# EAGLE board tin (EAGLE 6.3)
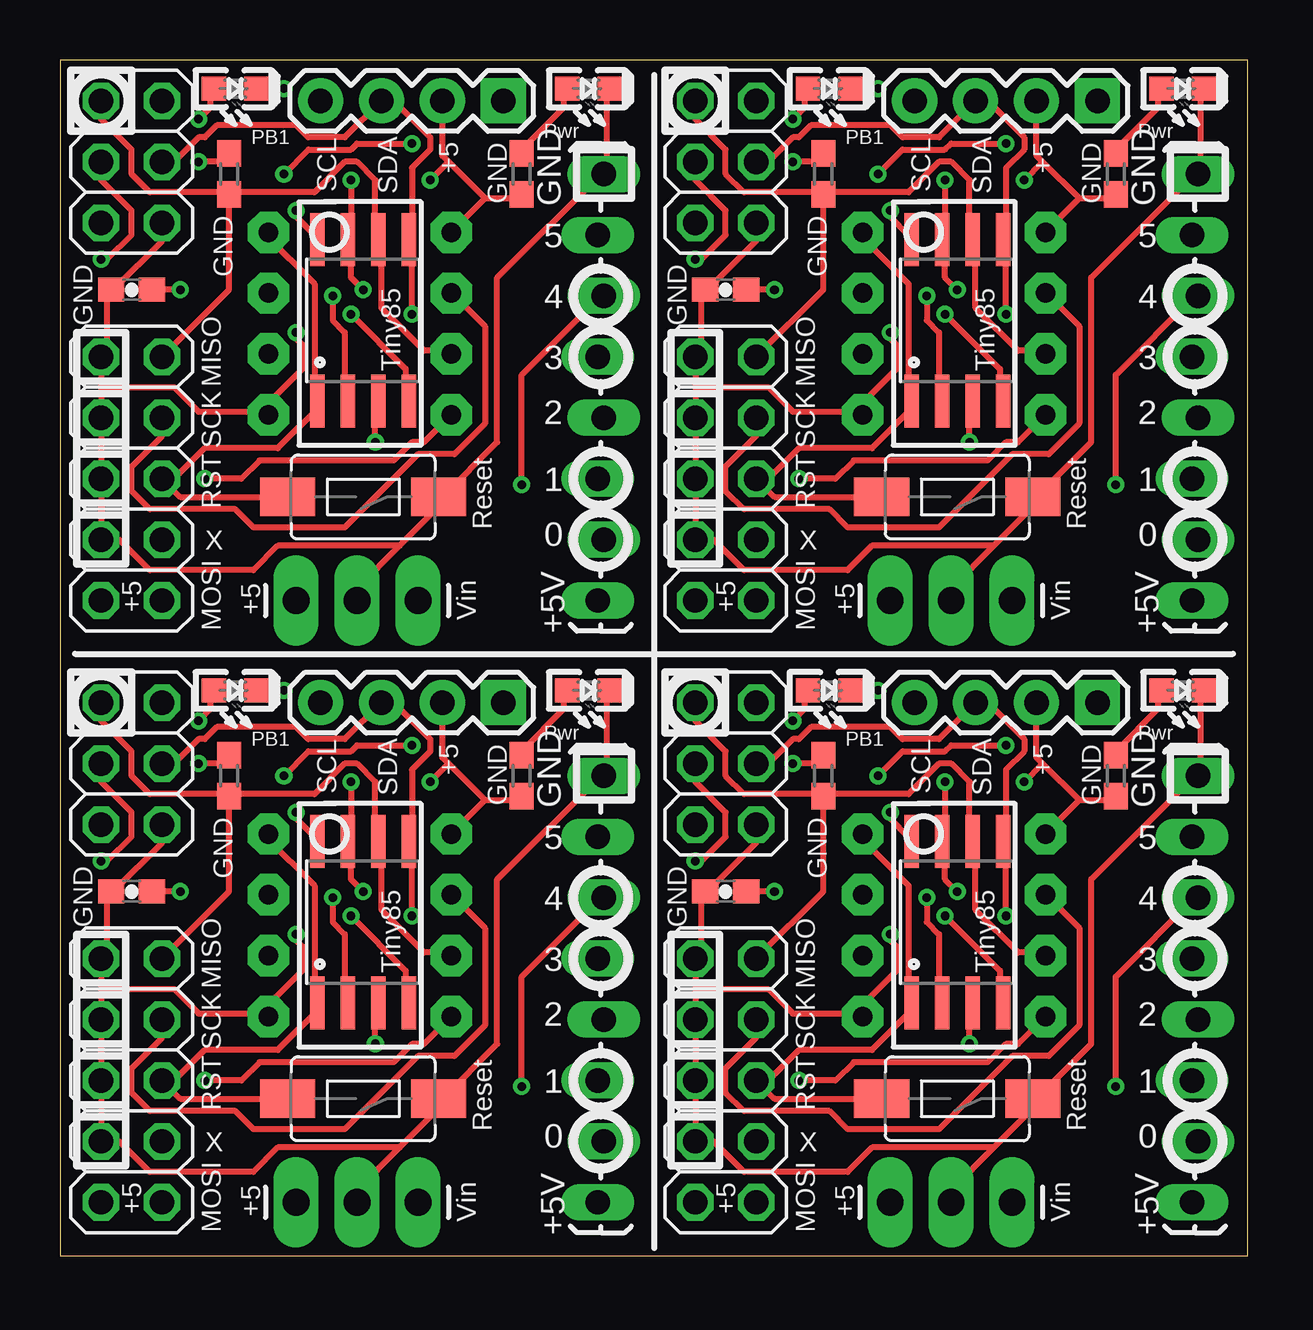
[diagram p0: board, top side]
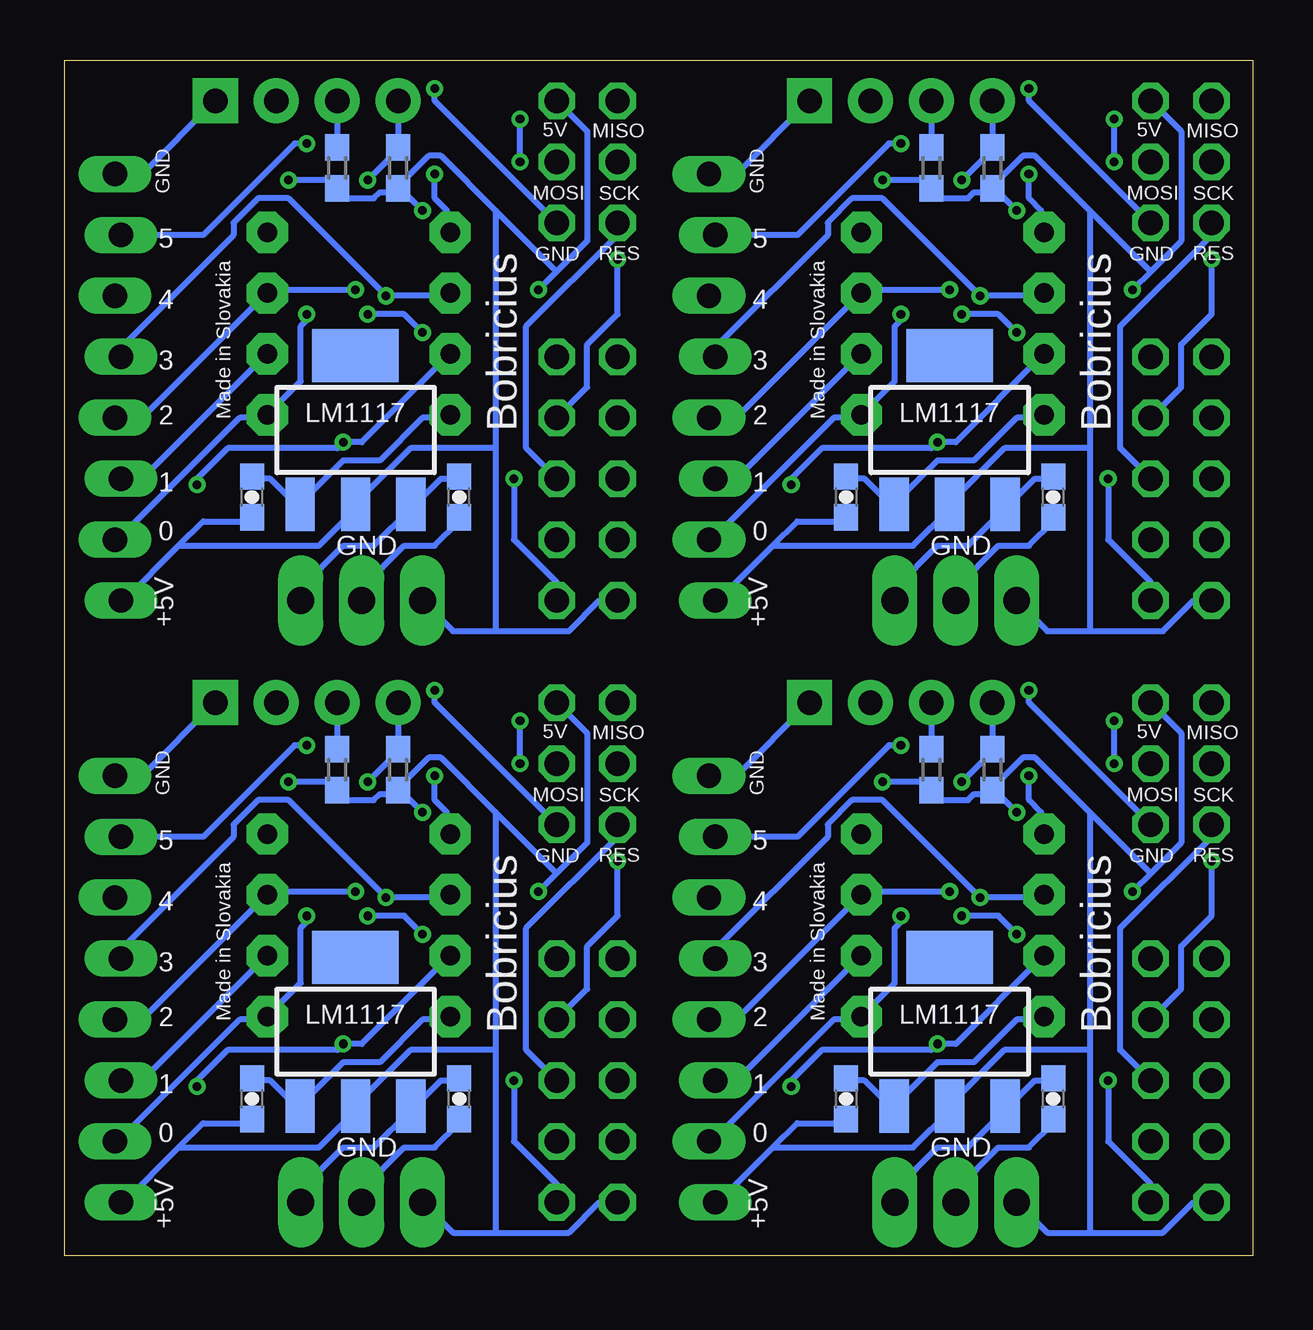
[diagram p1: board, bottom side, seen from below]

Size 49.52 x 49.84 mm. Coordinates in mm from the lower left corner, seen from the top.
Outline: 0,0 49.52,0 49.52,49.84 0,49.84 0,0
Copper layers (1*16): Top 0.0356mm / dielectric 1.5011mm / Bottom 0.0356mm
Design rules "LaenPCBOrder *": minimum track width 6mil, minimum drill 13mil, track to track 6mil, track to pad 6mil, pad to pad 6mil, via to via 6mil, smd to smd 6mil, copper to edge 15mil, drill to drill 6mil, minimum pad ring 7mil, minimum via ring 7mil, stop-mask expansion 4mil, vias tented up to drill 30mil, thermal gap 10mil
Net classes: 0 default: width 0.229 mm, drill 0.381 mm, clearance 0.229 mm; 1 GND: width 0.229 mm, drill 0.381 mm, clearance 0.229 mm; 2 pwr: width 0.229 mm, drill 0.381 mm, clearance 0.229 mm

## Footprints (pad centres in the part's own frame; a part is rotated, then mirrored left to right if it is on the bottom)
0603-CAP = smd 1.1 x 1: 1 -0.85,0; 2 0.85,0
SOT223 = smd 1.219 x 2.235: 1 -2.311,-3.099; 2 0,-3.099; 3 2.311,-3.099 | smd 3.6 x 2.2: 4 0,3.099
2X03 = drill 1.016 octagon: 1 -2.54,-1.27; 2 -2.54,1.27; 3 0,-1.27; 4 0,1.27; 5 2.54,-1.27; 6 2.54,1.27
2X05 = drill 1.016 octagon: 1 -5.08,-1.27; 2 -5.08,1.27; 3 -2.54,-1.27; 4 -2.54,1.27; 5 0,-1.27; 6 0,1.27; 7 2.54,-1.27; 8 2.54,1.27; 9 5.08,-1.27; 10 5.08,1.27
1X08_LOCK_LONGPADS = drill 1.016 long: 1 0,0.127; 2 2.54,-0.127; 3 5.08,0.127; 4 7.62,-0.127; 5 10.16,0.127; 6 12.7,-0.127; 7 15.24,0.127; 8 17.78,-0.127
1X03_LONGPADS = drill 1.118 pad 1.88 long: 1 0,0; 2 2.54,0; 3 5.08,0
1X04 = drill 1.016 pad 1.88 square: 1 0,0 | drill 1.016 pad 1.88: 2 2.54,0; 3 5.08,0; 4 7.62,0
LED-0603 = smd 1.016 x 1.016: A 0.889,0; C -0.889,0
R0603 = smd 1.1 x 1: 1 -0.85,0; 2 0.85,0
TACTILE-SWITCH-1101NE = smd 2.3 x 1.6: P$1 -3.15,0; P$2 3.15,0
DIP08 = drill 0.813 pad 1.727 octagon: 1 -3.81,-3.81; 2 -1.27,-3.81; 3 1.27,-3.81; 4 3.81,-3.81; 5 3.81,3.81; 6 1.27,3.81; 7 -1.27,3.81; 8 -3.81,3.81
SO08-EIAJ = smd 0.61 x 2.21: 1 -1.905,-3.378; 2 -0.635,-3.378; 3 0.635,-3.378; 4 1.905,-3.378; 5 1.905,3.353; 6 0.635,3.353; 7 -0.635,3.353; 8 -1.905,3.353

## Placement (x,y rotation side)
C1  0.1uf  [0603-CAP]  16.95,31.62 270 bottom
C2  0.1uf  [0603-CAP]  8.32,31.62 90 bottom
C3  0.1uf  [0603-CAP]  16.95,6.54 270 bottom
C4  0.1uf  [0603-CAP]  2.98,40.26 0 top
C5  0.1uf  [0603-CAP]  8.32,6.54 90 bottom
C6  0.1uf  [0603-CAP]  2.98,15.18 0 top
C7  0.1uf  [0603-CAP]  41.72,31.62 270 bottom
C8  0.1uf  [0603-CAP]  33.08,31.62 90 bottom
C9  0.1uf  [0603-CAP]  27.75,40.26 0 top
C10  0.1uf  [0603-CAP]  41.72,6.54 270 bottom
C11  0.1uf  [0603-CAP]  33.08,6.54 90 bottom
C12  0.1uf  [0603-CAP]  27.75,15.18 0 top
IC1  [SOT223]  12.64,9.33 0 bottom
IC2  [SOT223]  12.64,34.42 0 bottom
IC3  [SOT223]  37.4,34.42 0 bottom
IC4  [SOT223]  37.4,9.33 0 bottom
JP1  [2X03]  2.98,45.59 270 top
JP2  [2X05]  2.98,7.3 90 top
JP3  [1X08_LOCK_LONGPADS]  22.54,45.08 270 top
JP4  [2X05]  2.98,32.39 90 top
JP5  [1X03_LONGPADS]  9.84,27.31 0 top
JP6  [1X04]  18.48,48.13 180 top
JP7  [1X03_LONGPADS]  9.84,2.22 0 top
JP8  [2X03]  2.98,20.51 270 top
JP9  [1X04]  18.48,23.05 180 top
JP10  [1X08_LOCK_LONGPADS]  22.54,20 270 top
JP11  [2X05]  27.75,32.39 90 top
JP12  [1X03_LONGPADS]  34.61,27.31 0 top
JP13  [2X03]  27.75,45.59 270 top
JP14  [1X04]  43.24,48.13 180 top
JP15  [1X08_LOCK_LONGPADS]  47.31,45.08 270 top
JP16  [2X05]  27.75,7.3 90 top
JP17  [1X03_LONGPADS]  34.61,2.22 0 top
JP18  [2X03]  27.75,20.51 270 top
JP19  [1X04]  43.24,23.05 180 top
JP20  [1X08_LOCK_LONGPADS]  47.31,20 270 top
PB1  NA  [LED-0603]  7.3,48.64 180 top
PB2  NA  [LED-0603]  7.3,23.56 180 top
PB3  NA  [LED-0603]  32.07,48.64 180 top
PB4  NA  [LED-0603]  32.07,23.56 180 top
PWR  NA  [LED-0603]  22.03,48.64 180 top
PWR1  NA  [LED-0603]  22.03,23.56 180 top
PWR2  NA  [LED-0603]  46.8,48.64 180 top
PWR3  NA  [LED-0603]  46.8,23.56 180 top
R1  1k  [R0603]  7.05,45.08 270 top
R2  4K7  [R0603]  13.4,45.34 90 bottom
R3  4K7  [R0603]  10.86,45.34 90 bottom
R4  1k  [R0603]  19.24,20 270 top
R5  1k  [R0603]  19.24,45.08 270 top
R6  1k  [R0603]  7.05,20 270 top
R7  4K7  [R0603]  13.4,20.26 90 bottom
R8  4K7  [R0603]  10.86,20.26 90 bottom
R9  1k  [R0603]  44.01,45.08 270 top
R10  1k  [R0603]  31.81,45.08 270 top
R11  4K7  [R0603]  38.16,45.34 90 bottom
R12  4K7  [R0603]  35.62,45.34 90 bottom
R13  1k  [R0603]  44.01,20 270 top
R14  1k  [R0603]  31.81,20 270 top
R15  4K7  [R0603]  38.16,20.26 90 bottom
R16  4K7  [R0603]  35.62,20.26 90 bottom
RESET  SWITCH-MOMENTARY-2-SMD-1101NE  [TACTILE-SWITCH-1101NE]  12.64,31.62 180 top
RESET1  SWITCH-MOMENTARY-2-SMD-1101NE  [TACTILE-SWITCH-1101NE]  12.64,6.54 180 top
RESET2  SWITCH-MOMENTARY-2-SMD-1101NE  [TACTILE-SWITCH-1101NE]  37.4,31.62 180 top
RESET3  SWITCH-MOMENTARY-2-SMD-1101NE  [TACTILE-SWITCH-1101NE]  37.4,6.54 180 top
U1  TINY85  [DIP08]  12.5,38.85 270 top
U2  Tiny45-20-SMT  [SO08-EIAJ]  12.64,38.99 0 top
U3  TINY85  [DIP08]  12.5,13.77 270 top
U4  Tiny45-20-SMT  [SO08-EIAJ]  12.64,13.91 0 top
U5  TINY85  [DIP08]  37.27,38.85 270 top
U6  Tiny45-20-SMT  [SO08-EIAJ]  37.4,38.99 0 top
U7  TINY85  [DIP08]  37.27,13.77 270 top
U8  Tiny45-20-SMT  [SO08-EIAJ]  37.4,13.91 0 top

## Library data of the parts
C1-C12 IC1-IC4 JP3 JP5-JP7 JP9 JP10 JP12 JP14 JP15 JP17 JP19 JP20 RESET RESET1-RESET3 = SparkFun
JP1 JP2 JP4 JP8 JP11 JP13 JP16 JP18 = pinhead
PB1-PB4 PWR PWR1-PWR3 = DOUBLE-SIDE
R1-R16 = rcl
U1 U3 U5 U7 = SparkFun-DigitalIC; PROD_ID: IC-09439
U2 U4 U6 U8 = SparkFun-DigitalIC; PROD_ID: IC-08922

## Nets
GND: C1.1 C2.1 C4.1 IC2.1 JP1.6 JP3.1 JP4.4 JP4.6 JP4.8 JP4.10 JP5.2 JP6.1 PB1.C PWR.C RESET.P$1 U1.4 U2.4
GND1: C3.1 C5.1 C6.1 IC1.1 JP2.4 JP2.6 JP2.8 JP2.10 JP7.2 JP8.6 JP9.1 JP10.1 PB2.C PWR1.C RESET1.P$1 U3.4 U4.4
GND2: C7.1 C8.1 C9.1 IC3.1 JP11.4 JP11.6 JP11.8 JP11.10 JP12.2 JP13.6 JP14.1 JP15.1 PB3.C PWR2.C RESET2.P$1 U5.4 U6.4
GND3: C10.1 C11.1 C12.1 IC4.1 JP16.4 JP16.6 JP16.8 JP16.10 JP17.2 JP18.6 JP19.1 JP20.1 PB4.C PWR3.C RESET3.P$1 U7.4 U8.4
N$1 [pwr]: PWR1.A R4.1
N$2 [pwr]: PWR2.A R9.1
N$3 [pwr]: PWR.A R5.1
N$4 [pwr]: PWR3.A R13.1
PB1: JP1.1 JP3.6 JP4.9 R1.2 U1.6 U2.6
PB2: JP2.9 JP8.1 JP10.6 R6.2 U3.6 U4.6
PB3: JP11.9 JP13.1 JP15.6 R10.2 U5.6 U6.6
PB4: JP16.9 JP18.1 JP20.6 R14.2 U7.6 U8.6
PIN1R: PB1.A R1.1
PIN1R1: PB2.A R6.1
PIN1R2: PB3.A R10.1
PIN1R3: PB4.A R14.1
RES: JP1.5 JP3.2 JP4.5 RESET.P$2 U1.1 U2.1
RES1: JP2.5 JP8.5 JP10.2 RESET1.P$2 U3.1 U4.1
RES2: JP11.5 JP13.5 JP15.2 RESET2.P$2 U5.1 U6.1
RES3: JP16.5 JP18.5 JP20.2 RESET3.P$2 U7.1 U8.1
SCL: JP1.3 JP3.5 JP4.7 JP6.4 R3.2 U1.7 U2.7
SCL1: JP2.7 JP8.3 JP9.4 JP10.5 R8.2 U3.7 U4.7
SCL2: JP11.7 JP13.3 JP14.4 JP15.5 R12.2 U5.7 U6.7
SCL3: JP16.7 JP18.3 JP19.4 JP20.5 R16.2 U7.7 U8.7
SDA: JP1.4 JP3.7 JP4.1 JP6.3 R2.2 U1.5 U2.5
SDA1: JP2.1 JP8.4 JP9.3 JP10.7 R7.2 U3.5 U4.5
SDA2: JP11.1 JP13.4 JP14.3 JP15.7 R11.2 U5.5 U6.5
SDA3: JP16.1 JP18.4 JP19.3 JP20.7 R15.2 U7.5 U8.5
USBM: JP3.4 U1.2 U2.2
USBM1: JP10.4 U3.2 U4.2
USBM2: JP15.4 U5.2 U6.2
USBM3: JP20.4 U7.2 U8.2
USBP: JP3.3 U1.3 U2.3
USBP1: JP10.3 U3.3 U4.3
USBP2: JP15.3 U5.3 U6.3
USBP3: JP20.3 U7.3 U8.3
VCC [pwr]: C1.2 C4.2 IC2.2 JP1.2 JP3.8 JP4.2 JP5.1 JP6.2 R2.1 R3.1 R5.2 U1.8 U2.8
VCC1 [pwr]: C3.2 C6.2 IC1.2 JP2.2 JP7.1 JP8.2 JP9.2 JP10.8 R4.2 R7.1 R8.1 U3.8 U4.8
VCC2 [pwr]: C7.2 C9.2 IC3.2 JP11.2 JP12.1 JP13.2 JP14.2 JP15.8 R9.2 R11.1 R12.1 U5.8 U6.8
VCC3 [pwr]: C10.2 C12.2 IC4.2 JP16.2 JP17.1 JP18.2 JP19.2 JP20.8 R13.2 R15.1 R16.1 U7.8 U8.8
VIN: C2.2 IC2.3 JP5.3
VIN1: C5.2 IC1.3 JP7.3
VIN2: C8.2 IC3.3 JP12.3
VIN3: C11.2 IC4.3 JP17.3

## Tracks (layer width: path | path; a pad name or v marks a point on that pad's centre or on a via)
GND  (via drill 0.36)
  Top 0.254: v12.13,39.24 14.41,36.96 14.41,35.69 U2.4 | v9.84,38.48 9.84,38.23 10.1,37.97 10.1,36.96 8.83,35.69 8.83,35.18 U1.4 8.57,35.18 5.78,35.18 4.76,36.19 1.71,36.19 | v9.33,48.64 PB1.C | 1.71,36.19 JP4.10 1.97,37.72 1.97,40.26 C4.1 2.22,40.26 4.25,42.29 JP1.6 | 1.71,36.19 JP4.8 JP4.6 JP4.4 2.48,29.85 3.75,28.57 8.06,28.57 9.08,29.59 14.16,29.59 | PWR.C 22.8,48.64 22.8,45.08 JP3.1 22.54,45.08 18.22,40.77 18.22,33.91 15.94,31.62 RESET.P$1 15.68,31.62 15.68,31.11 14.16,29.59 | 14.16,29.59 12.38,27.81 JP5.2
  Bottom 0.254: C1.1 16.95,32.39 16.19,32.39 15.18,31.37 IC2.1 14.92,31.37 13.14,33.15 11.62,33.15 9.84,34.92 8.83,34.92 U1.4 | v12.13,39.24 10.6,39.24 v9.84,38.48 | v9.33,48.64 9.33,48.13 JP1.6 | JP3.1 21.53,45.08 JP6.1 | JP5.2 12.38,27.81 10.6,29.59 9.33,29.59 8.32,30.61 C2.1
GND1  (via drill 0.36)
  Top 0.254: v12.13,14.16 14.41,11.88 14.41,10.61 U4.4 | v9.84,13.4 9.84,13.14 10.1,12.89 10.1,11.88 8.83,10.61 8.83,10.1 U3.4 8.57,10.1 5.78,10.1 4.76,11.11 1.71,11.11 | v9.33,23.56 PB2.C | 1.71,11.11 JP2.10 1.97,12.64 1.97,15.18 C6.1 2.22,15.18 4.25,17.21 JP8.6 | 1.71,11.11 JP2.8 JP2.6 JP2.4 2.48,4.76 3.75,3.49 8.06,3.49 9.08,4.51 14.16,4.51 | PWR1.C 22.8,23.56 22.8,20 JP10.1 22.54,20 18.22,15.68 18.22,8.83 15.94,6.54 RESET1.P$1 15.68,6.54 15.68,6.03 14.16,4.51 | 14.16,4.51 12.38,2.73 JP7.2
  Bottom 0.254: C3.1 16.95,7.3 16.19,7.3 15.18,6.29 IC1.1 14.92,6.29 13.14,8.06 11.62,8.06 9.84,9.84 8.83,9.84 U3.4 | v12.13,14.16 10.6,14.16 v9.84,13.4 | v9.33,23.56 9.33,23.05 JP8.6 | JP10.1 21.53,20 JP9.1 | JP7.2 12.38,2.73 10.6,4.51 9.33,4.51 8.32,5.52 C5.1
GND2  (via drill 0.36)
  Top 0.254: v36.89,39.24 39.18,36.96 39.18,35.69 U6.4 | v34.61,38.48 34.61,38.23 34.86,37.97 34.86,36.96 33.59,35.69 33.59,35.18 U5.4 33.34,35.18 30.54,35.18 29.53,36.19 26.48,36.19 | v34.1,48.64 PB3.C | 26.48,36.19 JP11.10 26.73,37.72 26.73,40.26 C9.1 26.99,40.26 29.02,42.29 JP13.6 | 26.48,36.19 JP11.8 JP11.6 JP11.4 27.24,29.85 28.51,28.57 32.83,28.57 33.85,29.59 38.93,29.59 | PWR2.C 47.56,48.64 47.56,45.08 JP15.1 47.31,45.08 42.99,40.77 42.99,33.91 40.7,31.62 RESET2.P$1 40.45,31.62 40.45,31.11 38.93,29.59 | 38.93,29.59 37.15,27.81 JP12.2
  Bottom 0.254: C7.1 41.72,32.39 40.96,32.39 39.94,31.37 IC3.1 39.69,31.37 37.91,33.15 36.39,33.15 34.61,34.92 33.59,34.92 U5.4 | v36.89,39.24 35.37,39.24 v34.61,38.48 | v34.1,48.64 34.1,48.13 JP13.6 | JP15.1 46.29,45.08 JP14.1 | JP12.2 37.15,27.81 35.37,29.59 34.1,29.59 33.08,30.61 C8.1
GND3  (via drill 0.36)
  Top 0.254: v36.89,14.16 39.18,11.88 39.18,10.61 U8.4 | v34.61,13.4 34.61,13.14 34.86,12.89 34.86,11.88 33.59,10.61 33.59,10.1 U7.4 33.34,10.1 30.54,10.1 29.53,11.11 26.48,11.11 | v34.1,23.56 PB4.C | 26.48,11.11 JP16.10 26.73,12.64 26.73,15.18 C12.1 26.99,15.18 29.02,17.21 JP18.6 | 26.48,11.11 JP16.8 JP16.6 JP16.4 27.24,4.76 28.51,3.49 32.83,3.49 33.85,4.51 38.93,4.51 | PWR3.C 47.56,23.56 47.56,20 JP20.1 47.31,20 42.99,15.68 42.99,8.83 40.7,6.54 RESET3.P$1 40.45,6.54 40.45,6.03 38.93,4.51 | 38.93,4.51 37.15,2.73 JP17.2
  Bottom 0.254: C10.1 41.72,7.3 40.96,7.3 39.94,6.29 IC4.1 39.69,6.29 37.91,8.06 36.39,8.06 34.61,9.84 33.59,9.84 U7.4 | v36.89,14.16 35.37,14.16 v34.61,13.4 | v34.1,23.56 34.1,23.05 JP18.6 | JP20.1 46.29,20 JP19.1 | JP17.2 37.15,2.73 35.37,4.51 34.1,4.51 33.08,5.52 C11.1
N$1
  Top 0.254: PWR1.A 21.02,23.56 21.02,22.8 19.24,21.02 R4.1
N$2
  Top 0.254: PWR2.A 45.78,48.64 45.78,47.88 44.01,46.1 R9.1
N$3
  Top 0.254: PWR.A 21.02,48.64 21.02,47.88 19.24,46.1 R5.1
N$4
  Top 0.254: PWR3.A 45.78,23.56 45.78,22.8 44.01,21.02 R13.1
PB1
  Top 0.254: JP4.9 7.05,40.26 R1.2 7.05,44.32 | JP1.1 1.71,47.37 2.98,46.1 2.98,45.08 3.75,44.32 7.05,44.32 | U1.6 16.19,37.72 15.18,37.72 13.4,39.5 13.4,42.29 U2.6 13.14,42.55 13.14,44.83 12.38,45.59 11.87,45.59 10.6,44.32 7.05,44.32
  Bottom 0.254: JP3.6 21.53,32.39 16.45,37.47 U1.6
PB2
  Top 0.254: JP2.9 7.05,15.18 R6.2 7.05,19.24 | JP8.1 1.71,22.29 2.98,21.02 2.98,20 3.75,19.24 7.05,19.24 | U3.6 16.19,12.64 15.18,12.64 13.4,14.41 13.4,17.21 U4.6 13.14,17.46 13.14,19.75 12.38,20.51 11.87,20.51 10.6,19.24 7.05,19.24
  Bottom 0.254: JP10.6 21.53,7.3 16.45,12.38 U3.6
PB3
  Top 0.254: JP11.9 31.81,40.26 R10.2 31.81,44.32 | JP13.1 26.48,47.37 27.75,46.1 27.75,45.08 28.51,44.32 31.81,44.32 | U5.6 40.96,37.72 39.94,37.72 38.16,39.5 38.16,42.29 U6.6 37.91,42.55 37.91,44.83 37.15,45.59 36.64,45.59 35.37,44.32 31.81,44.32
  Bottom 0.254: JP15.6 46.29,32.39 41.21,37.47 U5.6
PB4
  Top 0.254: JP16.9 31.81,15.18 R14.2 31.81,19.24 | JP18.1 26.48,22.29 27.75,21.02 27.75,20 28.51,19.24 31.81,19.24 | U7.6 40.96,12.64 39.94,12.64 38.16,14.41 38.16,17.21 U8.6 37.91,17.46 37.91,19.75 37.15,20.51 36.64,20.51 35.37,19.24 31.81,19.24
  Bottom 0.254: JP20.6 46.29,7.3 41.21,12.38 U7.6
PIN1R  (via drill 0.36)
  Top 0.254: 6.54,48.64 PB1.A 6.29,48.64 6.29,47.88 v5.78,47.37 | v5.78,45.59 6.79,45.59 7.05,45.85 R1.1
  Bottom 0.254: v5.78,45.59 v5.78,47.37
PIN1R1  (via drill 0.36)
  Top 0.254: 6.54,23.56 PB2.A 6.29,23.56 6.29,22.8 v5.78,22.29 | v5.78,20.51 6.79,20.51 7.05,20.77 R6.1
  Bottom 0.254: v5.78,20.51 v5.78,22.29
PIN1R2  (via drill 0.36)
  Top 0.254: 31.31,48.64 PB3.A 31.05,48.64 31.05,47.88 v30.54,47.37 | v30.54,45.59 31.56,45.59 31.81,45.85 R10.1
  Bottom 0.254: v30.54,45.59 v30.54,47.37
PIN1R3  (via drill 0.36)
  Top 0.254: 31.31,23.56 PB4.A 31.05,23.56 31.05,22.8 v30.54,22.29 | v30.54,20.51 31.56,20.51 31.81,20.77 R14.1
  Bottom 0.254: v30.54,20.51 v30.54,22.29
RES  (via drill 0.36)
  Top 0.254: RESET.P$2 5.02,31.62 4.51,32.13 | U1.1 8.57,42.55 10.6,40.51 10.6,35.69 U2.1 10.86,35.43 9.08,33.66 6.03,33.66 4.51,32.13 | v14.67,46.36 12.38,46.36 12.13,46.1 10.35,46.1 v9.33,45.08 | 4.51,32.13 JP4.5
  Bottom 0.254: JP1.5 1.71,42.55 5.52,38.73 5.52,33.66 JP4.5 | JP3.2 18.99,42.55 15.18,46.36 v14.67,46.36 | v9.33,45.08 9.33,44.07 8.83,43.56 8.83,42.8 U1.1
RES1  (via drill 0.36)
  Top 0.254: RESET1.P$2 5.02,6.54 4.51,7.05 | U3.1 8.57,17.46 10.6,15.43 10.6,10.61 U4.1 10.86,10.35 9.08,8.57 6.03,8.57 4.51,7.05 | v14.67,21.27 12.38,21.27 12.13,21.02 10.35,21.02 v9.33,20 | 4.51,7.05 JP2.5
  Bottom 0.254: JP8.5 1.71,17.46 5.52,13.65 5.52,8.57 JP2.5 | JP10.2 18.99,17.46 15.18,21.27 v14.67,21.27 | v9.33,20 9.33,18.99 8.83,18.48 8.83,17.72 U3.1
RES2  (via drill 0.36)
  Top 0.254: RESET2.P$2 29.78,31.62 29.27,32.13 | U5.1 33.34,42.55 35.37,40.51 35.37,35.69 U6.1 35.62,35.43 33.85,33.66 30.8,33.66 29.27,32.13 | v39.43,46.36 37.15,46.36 36.89,46.1 35.12,46.1 v34.1,45.08 | 29.27,32.13 JP11.5
  Bottom 0.254: JP13.5 26.48,42.55 30.29,38.73 30.29,33.66 JP11.5 | JP15.2 43.75,42.55 39.94,46.36 v39.43,46.36 | v34.1,45.08 34.1,44.07 33.59,43.56 33.59,42.8 U5.1
RES3  (via drill 0.36)
  Top 0.254: RESET3.P$2 29.78,6.54 29.27,7.05 | U7.1 33.34,17.46 35.37,15.43 35.37,10.61 U8.1 35.62,10.35 33.85,8.57 30.8,8.57 29.27,7.05 | v39.43,21.27 37.15,21.27 36.89,21.02 35.12,21.02 v34.1,20 | 29.27,7.05 JP16.5
  Bottom 0.254: JP18.5 26.48,17.46 30.29,13.65 30.29,8.57 JP16.5 | JP20.2 43.75,17.46 39.94,21.27 v39.43,21.27 | v34.1,20 34.1,18.99 33.59,18.48 33.59,17.72 U7.1
SCL  (via drill 0.36)
  Top 0.254: v12.13,44.83 12.13,42.55 U2.7 12.13,42.29 12.13,40.77 v12.64,40.26 | JP4.7 4.25,34.16 2.98,32.89 2.98,31.88 3.75,31.11 7.3,31.11 8.06,30.35 11.87,30.35 14.92,33.4 16.45,33.4 17.72,34.67 17.72,38.73 16.45,40 U1.7 | JP1.3 1.71,44.83 2.98,43.56 2.98,42.55 1.97,41.53 v1.71,41.53
  Bottom 0.254: JP6.4 R3.2 10.86,46.1 v12.13,44.83 | JP3.5 21.53,34.92 16.45,40 U1.7 16.19,40.26 v12.64,40.26 | v1.71,41.53 1.71,39.24 2.98,37.97 2.98,36.19 JP4.7
SCL1  (via drill 0.36)
  Top 0.254: v12.13,19.75 12.13,17.46 U4.7 12.13,17.21 12.13,15.68 v12.64,15.18 | JP2.7 4.25,9.08 2.98,7.81 2.98,6.79 3.75,6.03 7.3,6.03 8.06,5.27 11.87,5.27 14.92,8.32 16.45,8.32 17.72,9.59 17.72,13.65 16.45,14.92 U3.7 | JP8.3 1.71,19.75 2.98,18.48 2.98,17.46 1.97,16.45 v1.71,16.45
  Bottom 0.254: JP9.4 R8.2 10.86,21.02 v12.13,19.75 | JP10.5 21.53,9.84 16.45,14.92 U3.7 16.19,15.18 v12.64,15.18 | v1.71,16.45 1.71,14.16 2.98,12.89 2.98,11.11 JP2.7
SCL2  (via drill 0.36)
  Top 0.254: v36.89,44.83 36.89,42.55 U6.7 36.89,42.29 36.89,40.77 v37.4,40.26 | JP11.7 29.02,34.16 27.75,32.89 27.75,31.88 28.51,31.11 32.07,31.11 32.83,30.35 36.64,30.35 39.69,33.4 41.21,33.4 42.48,34.67 42.48,38.73 41.21,40 U5.7 | JP13.3 26.48,44.83 27.75,43.56 27.75,42.55 26.73,41.53 v26.48,41.53
  Bottom 0.254: JP14.4 R12.2 35.62,46.1 v36.89,44.83 | JP15.5 46.29,34.92 41.21,40 U5.7 40.96,40.26 v37.4,40.26 | v26.48,41.53 26.48,39.24 27.75,37.97 27.75,36.19 JP11.7
SCL3  (via drill 0.36)
  Top 0.254: v36.89,19.75 36.89,17.46 U8.7 36.89,17.21 36.89,15.68 v37.4,15.18 | JP16.7 29.02,9.08 27.75,7.81 27.75,6.79 28.51,6.03 32.07,6.03 32.83,5.27 36.64,5.27 39.69,8.32 41.21,8.32 42.48,9.59 42.48,13.65 41.21,14.92 U7.7 | JP18.3 26.48,19.75 27.75,18.48 27.75,17.46 26.73,16.45 v26.48,16.45
  Bottom 0.254: JP19.4 R16.2 35.62,21.02 v36.89,19.75 | JP20.5 46.29,9.84 41.21,14.92 U7.7 40.96,15.18 v37.4,15.18 | v26.48,16.45 26.48,14.16 27.75,12.89 27.75,11.11 JP16.7
SDA  (via drill 0.36)
  Top 0.254: JP1.4 4.76,45.59 5.78,46.61 6.03,46.61 6.54,47.12 9.84,47.12 10.35,46.61 11.87,46.61 JP6.3 13.91,48.13 15.43,46.61 15.43,46.1 14.67,45.34 14.67,42.55 U2.5 14.67,42.29 v14.67,39.24 | v6.03,32.39 7.56,32.39 8.32,33.15 13.91,33.15 14.67,33.91 15.18,33.91 16.19,34.92 U1.5
  Bottom 0.254: JP6.3 R2.2 | JP4.1 4.25,28.07 6.03,29.85 v6.03,32.39 | JP3.7 22.54,29.85 17.46,34.92 16.45,34.92 U1.5 16.19,35.18 14.92,36.45 14.92,38.73 14.67,38.99 v14.67,39.24
SDA1  (via drill 0.36)
  Top 0.254: JP8.4 4.76,20.51 5.78,21.53 6.03,21.53 6.54,22.04 9.84,22.04 10.35,21.53 11.87,21.53 JP9.3 13.91,23.05 15.43,21.53 15.43,21.02 14.67,20.26 14.67,17.46 U4.5 14.67,17.21 v14.67,14.16 | v6.03,7.3 7.56,7.3 8.32,8.06 13.91,8.06 14.67,8.83 15.18,8.83 16.19,9.84 U3.5
  Bottom 0.254: JP9.3 R7.2 | JP2.1 4.25,2.98 6.03,4.76 v6.03,7.3 | JP10.7 22.54,4.76 17.46,9.84 16.45,9.84 U3.5 16.19,10.1 14.92,11.37 14.92,13.65 14.67,13.91 v14.67,14.16
SDA2  (via drill 0.36)
  Top 0.254: JP13.4 29.53,45.59 30.54,46.61 30.8,46.61 31.31,47.12 34.61,47.12 35.12,46.61 36.64,46.61 JP14.3 38.67,48.13 40.2,46.61 40.2,46.1 39.43,45.34 39.43,42.55 U6.5 39.43,42.29 v39.43,39.24 | v30.8,32.39 32.32,32.39 33.08,33.15 38.67,33.15 39.43,33.91 39.94,33.91 40.96,34.92 U5.5
  Bottom 0.254: JP14.3 R11.2 | JP11.1 29.02,28.07 30.8,29.85 v30.8,32.39 | JP15.7 47.31,29.85 42.23,34.92 41.21,34.92 U5.5 40.96,35.18 39.69,36.45 39.69,38.73 39.43,38.99 v39.43,39.24
SDA3  (via drill 0.36)
  Top 0.254: JP18.4 29.53,20.51 30.54,21.53 30.8,21.53 31.31,22.04 34.61,22.04 35.12,21.53 36.64,21.53 JP19.3 38.67,23.05 40.2,21.53 40.2,21.02 39.43,20.26 39.43,17.46 U8.5 39.43,17.21 v39.43,14.16 | v30.8,7.3 32.32,7.3 33.08,8.06 38.67,8.06 39.43,8.83 39.94,8.83 40.96,9.84 U7.5
  Bottom 0.254: JP19.3 R15.2 | JP16.1 29.02,2.98 30.8,4.76 v30.8,7.3 | JP20.7 47.31,4.76 42.23,9.84 41.21,9.84 U7.5 40.96,10.1 39.69,11.37 39.69,13.65 39.43,13.91 v39.43,14.16
USBM  (via drill 0.36)
  Top 0.254: v11.37,40 11.37,38.99 11.87,38.48 11.87,35.69 U2.2
  Bottom 0.254: U1.2 8.83,40 v11.37,40 15.43,44.07 16.7,44.07 17.72,43.05 17.72,42.55 22.29,37.97 22.29,37.47 JP3.4
USBM1  (via drill 0.36)
  Top 0.254: v11.37,14.92 11.37,13.91 11.87,13.4 11.87,10.61 U4.2
  Bottom 0.254: U3.2 8.83,14.92 v11.37,14.92 15.43,18.99 16.7,18.99 17.72,17.97 17.72,17.46 22.29,12.89 22.29,12.38 JP10.4
USBM2  (via drill 0.36)
  Top 0.254: v36.13,40 36.13,38.99 36.64,38.48 36.64,35.69 U6.2
  Bottom 0.254: U5.2 33.59,40 v36.13,40 40.2,44.07 41.47,44.07 42.48,43.05 42.48,42.55 47.05,37.97 47.05,37.47 JP15.4
USBM3  (via drill 0.36)
  Top 0.254: v36.13,14.92 36.13,13.91 36.64,13.4 36.64,10.61 U8.2
  Bottom 0.254: U7.2 33.59,14.92 v36.13,14.92 40.2,18.99 41.47,18.99 42.48,17.97 42.48,17.46 47.05,12.89 47.05,12.38 JP20.4
USBP  (via drill 0.36)
  Top 0.254: v13.14,33.91 13.14,35.43 U2.3 | v19.24,32.13 19.24,36.7 22.54,40 JP3.3
  Bottom 0.254: U1.3 8.83,37.47 12.38,33.91 v13.14,33.91 13.4,33.66 17.97,33.66 19.24,32.39 v19.24,32.13
USBP1  (via drill 0.36)
  Top 0.254: v13.14,8.83 13.14,10.35 U4.3 | v19.24,7.05 19.24,11.62 22.54,14.92 JP10.3
  Bottom 0.254: U3.3 8.83,12.38 12.38,8.83 v13.14,8.83 13.4,8.57 17.97,8.57 19.24,7.3 v19.24,7.05
USBP2  (via drill 0.36)
  Top 0.254: v37.91,33.91 37.91,35.43 U6.3 | v44.01,32.13 44.01,36.7 47.31,40 JP15.3
  Bottom 0.254: U5.3 33.59,37.47 37.15,33.91 v37.91,33.91 38.16,33.66 42.74,33.66 44.01,32.39 v44.01,32.13
USBP3  (via drill 0.36)
  Top 0.254: v37.91,8.83 37.91,10.35 U8.3 | v44.01,7.05 44.01,11.62 47.31,14.92 JP20.3
  Bottom 0.254: U7.3 33.59,12.38 37.15,8.83 v37.91,8.83 38.16,8.57 42.74,8.57 44.01,7.3 v44.01,7.05
VCC  (via drill 0.36)
  Top 0.254: 17.72,44.07 19.24,44.07 R5.2 | 17.72,44.07 16.45,42.8 U1.8 | JP6.2 15.94,45.85 16.19,45.59 | 17.72,44.07 16.19,45.59 | v5.02,40.26 C4.2 | v9.84,43.56 9.84,43.31 10.6,42.55 U2.8 | v15.43,44.83 16.19,45.59
  Bottom 0.254: 20,29.59 22.29,27.31 JP3.8 | 20,29.59 18.99,30.61 16.95,30.61 C1.2 | 20,29.59 14.16,29.59 12.64,31.11 IC2.2 12.64,31.37 10.35,33.66 6.79,33.66 | JP4.2 2.48,27.31 3.75,26.04 6.79,26.04 | 6.79,26.04 8.57,26.04 JP5.1 | 4.25,41.02 2.98,42.29 2.98,46.86 JP1.2 | 4.25,41.02 v5.02,40.26 | 10.86,44.58 9.59,45.85 9.08,45.85 6.79,43.56 | 4.25,41.02 6.79,43.56 | 10.86,44.58 v9.84,43.56 | 10.86,44.58 R3.1 10.86,44.32 11.62,44.32 11.87,44.07 13.14,44.07 13.4,44.32 R2.1 13.4,44.58 13.65,44.83 v15.43,44.83 | 6.79,43.56 6.79,33.66 | 6.79,33.66 6.79,26.04
VCC1  (via drill 0.36)
  Top 0.254: 17.72,18.99 19.24,18.99 R4.2 | 17.72,18.99 16.45,17.72 U3.8 | JP9.2 15.94,20.77 16.19,20.51 | 17.72,18.99 16.19,20.51 | v5.02,15.18 C6.2 | v9.84,18.48 9.84,18.22 10.6,17.46 U4.8 | v15.43,19.75 16.19,20.51
  Bottom 0.254: 20,4.51 22.29,2.22 JP10.8 | 20,4.51 18.99,5.52 16.95,5.52 C3.2 | 20,4.51 14.16,4.51 12.64,6.03 IC1.2 12.64,6.29 10.35,8.57 6.79,8.57 | JP2.2 2.48,2.22 3.75,0.95 6.79,0.95 | 6.79,0.95 8.57,0.95 JP7.1 | 4.25,15.94 2.98,17.21 2.98,21.78 JP8.2 | 4.25,15.94 v5.02,15.18 | 10.86,19.49 9.59,20.77 9.08,20.77 6.79,18.48 | 4.25,15.94 6.79,18.48 | 10.86,19.49 v9.84,18.48 | 10.86,19.49 R8.1 10.86,19.24 11.62,19.24 11.87,18.99 13.14,18.99 13.4,19.24 R7.1 13.4,19.49 13.65,19.75 v15.43,19.75 | 6.79,18.48 6.79,8.57 | 6.79,8.57 6.79,0.95
VCC2  (via drill 0.36)
  Top 0.254: 42.48,44.07 44.01,44.07 R9.2 | 42.48,44.07 41.21,42.8 U5.8 | JP14.2 40.7,45.85 40.96,45.59 | 42.48,44.07 40.96,45.59 | v29.78,40.26 C9.2 | v34.61,43.56 34.61,43.31 35.37,42.55 U6.8 | v40.2,44.83 40.96,45.59
  Bottom 0.254: 44.77,29.59 47.05,27.31 JP15.8 | 44.77,29.59 43.75,30.61 41.72,30.61 C7.2 | 44.77,29.59 38.93,29.59 37.4,31.11 IC3.2 37.4,31.37 35.12,33.66 31.56,33.66 | JP11.2 27.24,27.31 28.51,26.04 31.56,26.04 | 31.56,26.04 33.34,26.04 JP12.1 | 29.02,41.02 27.75,42.29 27.75,46.86 JP13.2 | 29.02,41.02 v29.78,40.26 | 35.62,44.58 34.35,45.85 33.85,45.85 31.56,43.56 | 29.02,41.02 31.56,43.56 | 35.62,44.58 v34.61,43.56 | 35.62,44.58 R12.1 35.62,44.32 36.39,44.32 36.64,44.07 37.91,44.07 38.16,44.32 R11.1 38.16,44.58 38.42,44.83 v40.2,44.83 | 31.56,43.56 31.56,33.66 | 31.56,33.66 31.56,26.04
VCC3  (via drill 0.36)
  Top 0.254: 42.48,18.99 44.01,18.99 R13.2 | 42.48,18.99 41.21,17.72 U7.8 | JP19.2 40.7,20.77 40.96,20.51 | 42.48,18.99 40.96,20.51 | v29.78,15.18 C12.2 | v34.61,18.48 34.61,18.22 35.37,17.46 U8.8 | v40.2,19.75 40.96,20.51
  Bottom 0.254: 44.77,4.51 47.05,2.22 JP20.8 | 44.77,4.51 43.75,5.52 41.72,5.52 C10.2 | 44.77,4.51 38.93,4.51 37.4,6.03 IC4.2 37.4,6.29 35.12,8.57 31.56,8.57 | JP16.2 27.24,2.22 28.51,0.95 31.56,0.95 | 31.56,0.95 33.34,0.95 JP17.1 | 29.02,15.94 27.75,17.21 27.75,21.78 JP18.2 | 29.02,15.94 v29.78,15.18 | 35.62,19.49 34.35,20.77 33.85,20.77 31.56,18.48 | 29.02,15.94 31.56,18.48 | 35.62,19.49 v34.61,18.48 | 35.62,19.49 R16.1 35.62,19.24 36.39,19.24 36.64,18.99 37.91,18.99 38.16,19.24 R15.1 38.16,19.49 38.42,19.75 v40.2,19.75 | 31.56,18.48 31.56,8.57 | 31.56,8.57 31.56,0.95
VIN
  Bottom 0.254: C2.2 8.32,32.39 9.08,32.39 10.1,31.37 IC2.3 10.35,31.11 11.87,29.59 13.14,29.59 14.92,27.81 JP5.3
VIN1
  Bottom 0.254: C5.2 8.32,7.3 9.08,7.3 10.1,6.29 IC1.3 10.35,6.03 11.87,4.51 13.14,4.51 14.92,2.73 JP7.3
VIN2
  Bottom 0.254: C8.2 33.08,32.39 33.85,32.39 34.86,31.37 IC3.3 35.12,31.11 36.64,29.59 37.91,29.59 39.69,27.81 JP12.3
VIN3
  Bottom 0.254: C11.2 33.08,7.3 33.85,7.3 34.86,6.29 IC4.3 35.12,6.03 36.64,4.51 37.91,4.51 39.69,2.73 JP17.3

## Text on the board
tNames: PB1 | SCL | SDA | +5 | GND | Pwr | PB1 | SCL | SDA | +5 | GND | Pwr | GND | GND | GND | GND | 5 | 5 | GND | GND | 4 | 4 | Tiny85 | 3 | Tiny85 | 3 | MISO | MISO | 2 | 2 | SCK | SCK | 1 | 1 | RST | RST | Reset | Reset | X | 0 | X | 0 | +5 | +5 | MOSI | +5 | Vin | +5V | MOSI | +5 | Vin | +5V | PB1 | SCL | SDA | +5 | GND | Pwr | PB1 | SCL | SDA | +5 | GND | Pwr | GND | GND | GND | GND | 5 | 5 | GND | GND | 4 | 4 | Tiny85 | 3 | Tiny85 | 3 | MISO | MISO | 2 | 2 | SCK | SCK | RST | 1 | RST | 1 | Reset | Reset | X | 0 | X | 0 | +5 | +5 | MOSI | +5 | Vin | +5V | MOSI | +5 | Vin | +5V
bNames: MISO | MISO | 5V | 5V | SCK | MOSI | GND | SCK | MOSI | GND | RES | 5 | RES | 5 | GND | GND | 4 | 4 | 3 | 3 | LM1117 | Made in Slovakia | LM1117 | Made in Slovakia | Bobricius | 2 | Bobricius | 2 | 1 | 1 | 0 | 0 | GND | GND | +5V | +5V | MISO | MISO | 5V | 5V | SCK | MOSI | GND | SCK | MOSI | GND | RES | 5 | RES | 5 | GND | GND | 4 | 4 | 3 | 3 | LM1117 | Made in Slovakia | LM1117 | Made in Slovakia | Bobricius | 2 | Bobricius | 2 | 1 | 1 | GND | 0 | GND | 0 | +5V | +5V